# Altium PCB PCB_Max30100_2025-12-17.pcbdoc
Units mm, origin at the board's own origin, x right, y up, seen from the top; angles counter-clockwise.
Board outline 121.28 x 126.93 mm, 2 copper layers (Top Layer, Bottom Layer); 16 components, 15 nets, 78 pads, 0 vias.
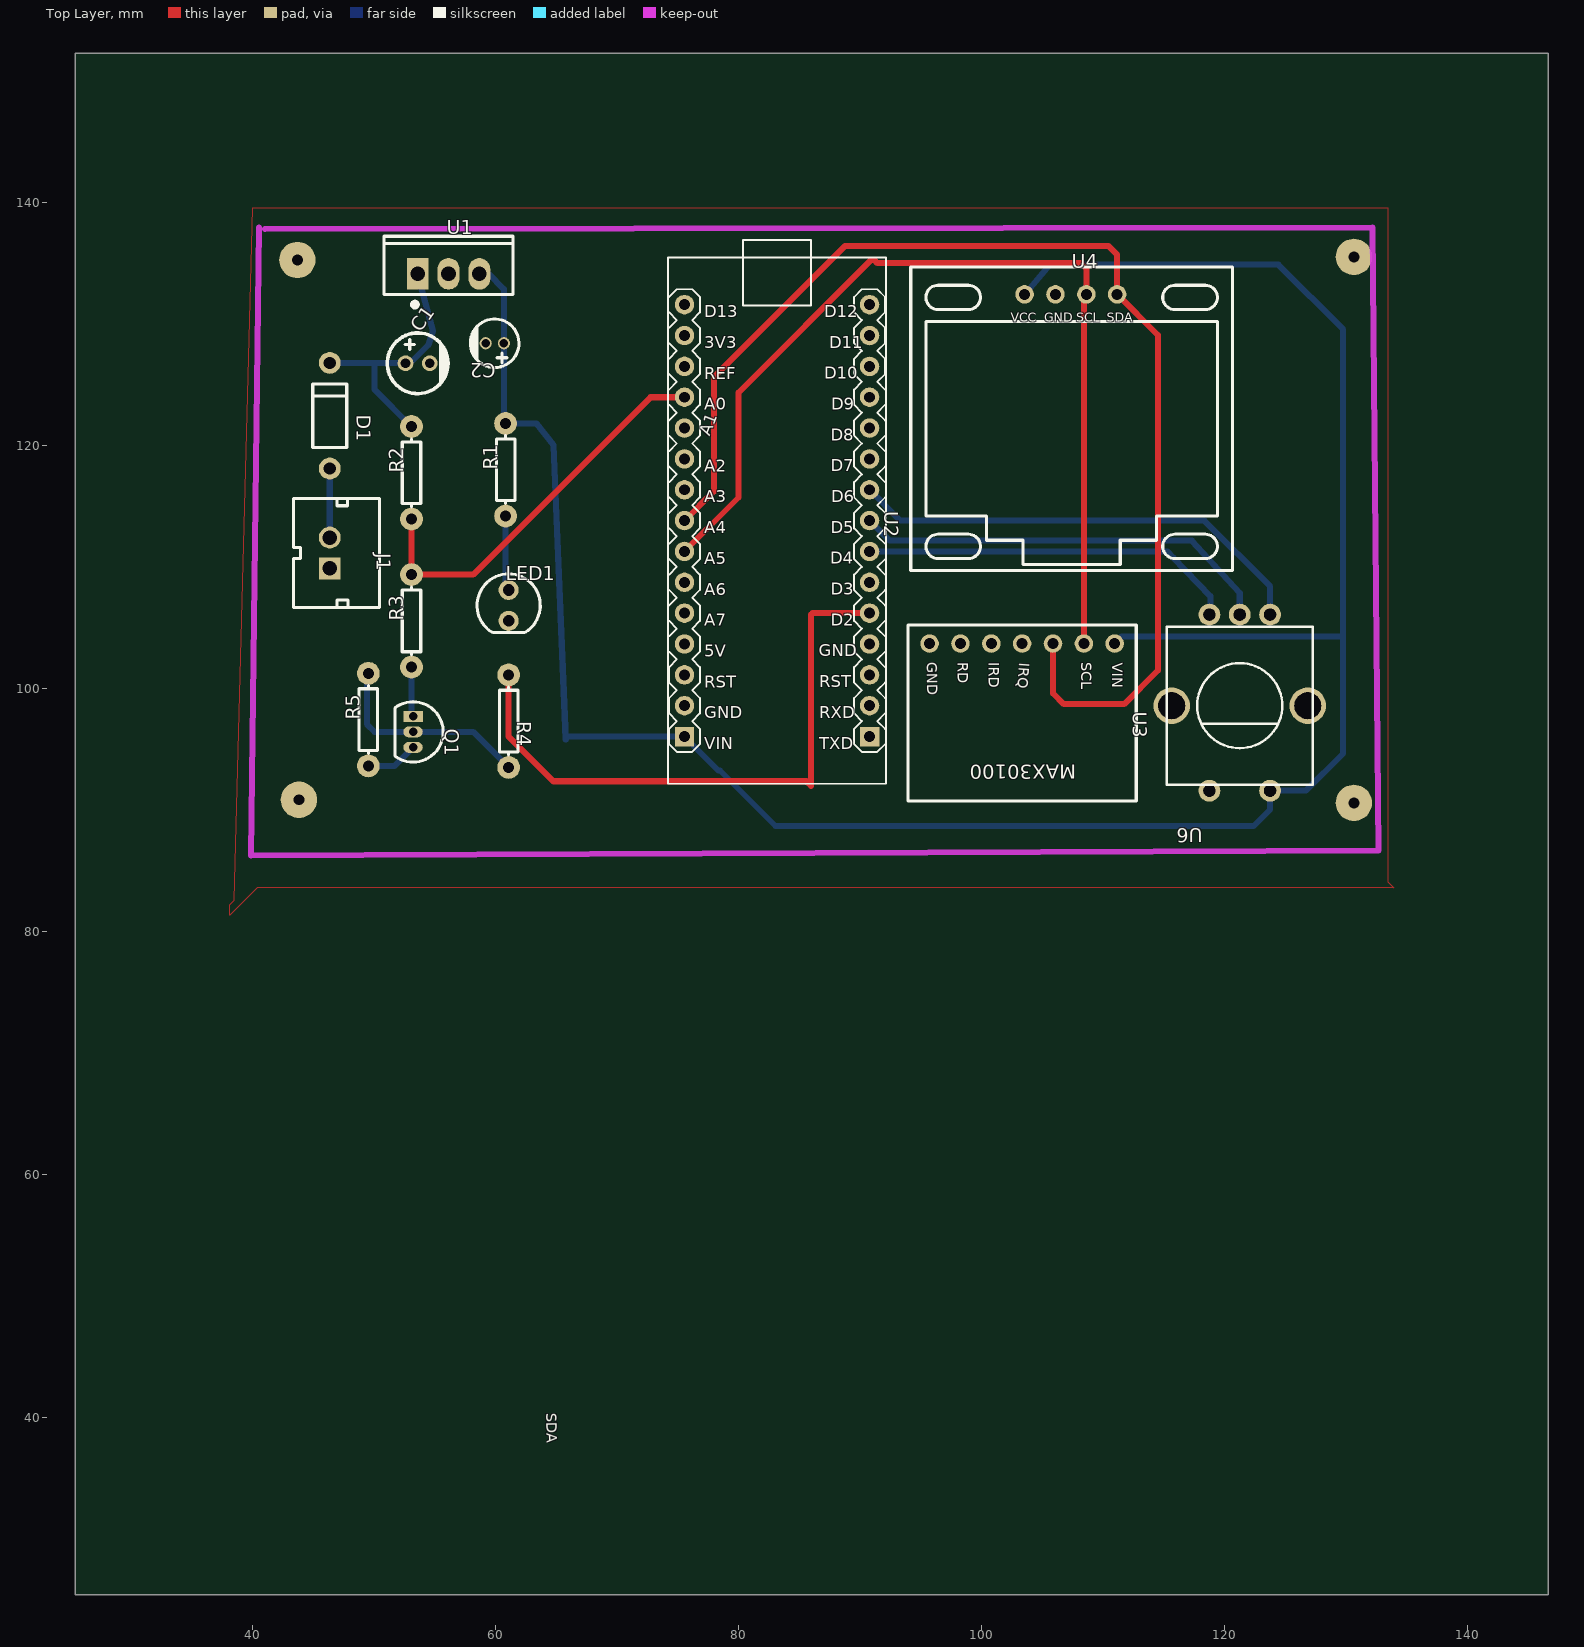
[diagram p0: Top Layer view]
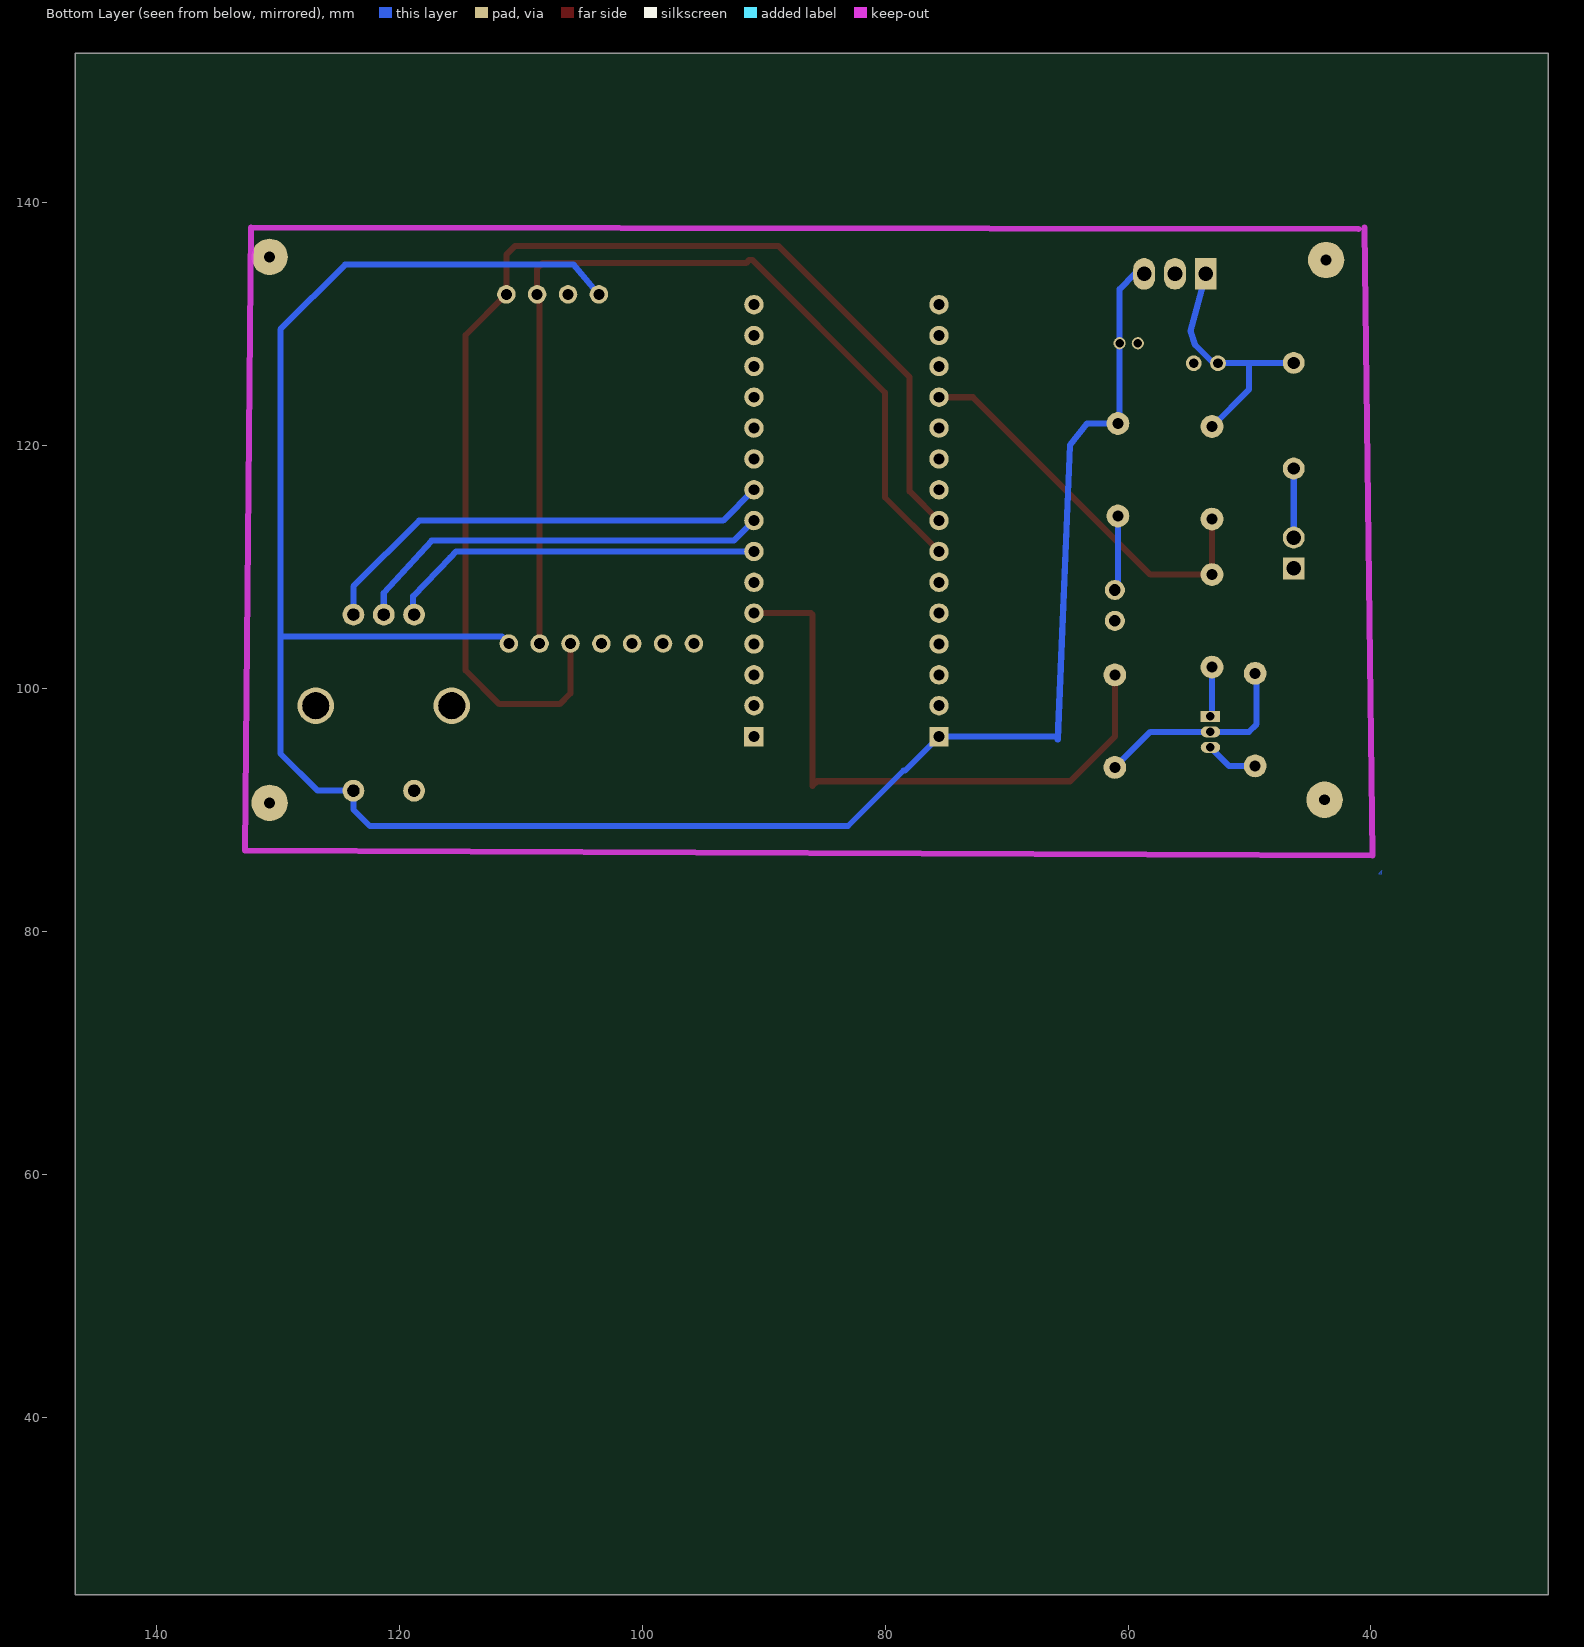
[diagram p1: Bottom Layer view, seen from below]

## Layer stack, top to bottom
Top Layer: signal copper (thickness not stored)
Dielectric: dielectric 0.32, FR-4, Dk 4.8
Bottom Layer: signal copper (thickness not stored)

## Board outline
146.685,25.4 25.4,25.4 25.4,152.326 146.685,152.326

## Components (designator, comment, footprint, x,y, rotation, side; value= is the part's Value field where it differs from the comment)
C1 "100uF/16V" CAP-D5.0×F2.0 53.594,126.799 r0 top
C2 "10uF" CAP-D4.0×F1.5 59.944,128.45 r180 top
D1 "1N4007" DO-41_BD2.4-L4.7-P8.70-D0.9-RD 46.355,122.481 r270 top
J1 "RMC 2.54_1x2" RMC_2P 46.355,111.178 r270 top
LED1 "0" LED-TH_BD5.0_RED 61.087,106.86 r0 top
Q1 "BC547C" TO-92-3_L4.9-W3.7-P1.27-L 53.213,96.446 r270 top
R1 "1k" R_AXIAL-0.3 60.833,118.036 r90 top
R2 "10K" R_AXIAL-0.3 53.086,117.782 r90 top
R3 "2K" R_AXIAL-0.3 53.086,105.59 r90 top
R4 "220R" R_AXIAL-0.3 61.087,97.335 r270 top
R5 "10K" R_AXIAL-0.3 49.53,97.462 r90 top
U1 "7805(TO-220)" TO-220-3_L10.0-W4.5-P2.54-L 56.134,134.165 r0 top
U2 "ARDUINO_NANO" COMM-TH_ARDUINO_NANO 83.185,113.845 r270 top
U3 "MAX30100 MODULE COPY" MAX30100_MODULE 111.252,104.193 r270 top
U4 "OLED-Module-096inch" OLED-MODULE-096INCH-FOOTPRINT 107.442,122.227 r0 top
U6 "Rotary Encoder" SF-ROTARY-ENCODER-SWITCH 121.285,98.605 r180 top

## Footprints (in the part's own frame and the unit in brackets; to place one, negate y for a bottom-side part, rotate by r counter-clockwise, add the part's x,y. Pads: shape width x height; smd on the part's side, far side on the other; paste and mask are expansions set on the pad)
CAP-D4.0×F1.5 [mm]
  round 1 hole 0.7 paste+0 mask+0.102: 1(-0.751,0) 2(0.751,0)
  silkscreen extent -1.98,-2 2.02,2
CAP-D5.0×F2.0 [mm]
  round 1.3 hole 0.8 paste+0 mask+0.102: 1(-1,0) 2(1,0)
  silkscreen extent -2.5,-2.5 2.5,2.5
COMM-TH_ARDUINO_NANO [mm]
  rect 1.6x1.6 hole 0.9 paste+0 mask+0.051: 1(17.78,7.62) 30(17.78,-7.62)
  round 1.6 hole 0.9 paste+0 mask+0.051: 2(15.24,7.62) 3(12.7,7.62) 4(10.16,7.62) 5(7.621,7.62) 6(5.08,7.62) 7(2.541,7.62) 8(0,7.62) 9(-2.539,7.62) 10(-5.08,7.62) 11(-7.619,7.62) 12(-10.16,7.62) 13(-12.699,7.62) 14(-15.24,7.62) 15(-17.78,7.62) 16(-17.78,-7.62) 17(-15.241,-7.62) 18(-12.7,-7.62) 19(-10.161,-7.62) 20(-7.62,-7.62) 21(-5.081,-7.62) 22(-2.54,-7.62) 23(-0.001,-7.62) 24(2.54,-7.62) 25(5.079,-7.62) 26(7.62,-7.62) 27(10.159,-7.62) 28(12.7,-7.62) 29(15.24,-7.62)
  silkscreen extent -23.11,-8.97 21.67,8.97
DO-41_BD2.4-L4.7-P8.70-D0.9-RD [mm]
  round 1.8 hole 1 paste+0 mask+0.051: 1(-4.35,0) 2(4.35,0)
  silkscreen extent -2.6,-1.4 2.6,1.4
LED-TH_BD5.0_RED [mil]
  round 65 hole 38 paste+0 mask+2: 1(0,50) 2(0,-50)
  silkscreen extent -102,-88 102,102
MAX30100_MODULE [mil]
  round 60 hole 36 paste+0 mask+4: 1(18.5,-10.4) 2(18.5,-110.4) 3(18.5,-210.4) 4(18.5,-310.4) 5(18.5,-410.4) 6(18.5,-510.4) 7(18.5,-610.4)
  silkscreen extent -42,-680 529,60
OLED-MODULE-096INCH-FOOTPRINT [mil]
  round 60 hole 36 paste+0 mask+10: 1(-152.36,403.54) 2(-52.36,403.54) 3(47.64,403.54) 4(147.64,403.54)
  silkscreen extent -522,-492 522,492
R_AXIAL-0.3 [mil]
  round 74 hole 35.4 paste+0 mask+2: 1(-150,0) 2(150,0)
  silkscreen extent -110,-30 110,30
RMC_2P [mm]
  rect 1.8x1.8 hole 1.2 paste+0 mask+0.102: 1(1.27,0)
  round 1.8 hole 1.2 paste+0 mask+0.102: 2(-1.27,0)
  silkscreen extent -4.5,-3 4.5,4.08
SF-ROTARY-ENCODER-SWITCH [mm]
  round 1.8 hole 1 paste+0 mask+0.051: 1(-2.5,-7.5) 2(0,-7.5) 3(2.5,-7.5) 4(-2.5,7) 5(2.5,7)
  round 3 hole 2.2 paste+0 mask+0.051: ""(-5.6,0) ""(5.6,0)
  silkscreen extent -6,-6.5 6,6.5
TO-92-3_L4.9-W3.7-P1.27-L [mm]
  rect 0.9x1.6 hole 0.7 paste+0 mask+0.051: 1(-1.27,0)
  oval 0.9x1.6 hole 0.7 paste+0 mask+0.051: 2(0,0) 3(1.27,0)
  silkscreen extent -2.48,-1.5 2.48,2.48
TO-220-3_L10.0-W4.5-P2.54-L [mm]
  rect 1.8x2.6 hole 1.2 paste+0 mask+0.051: 1(-2.54,0.005)
  oval 1.8x2.6 hole 1.2 paste+0 mask+0.051: 2(0,0.005) 3(2.54,-0.005)
  silkscreen extent -5.3,-2.73 5.3,3.09

## Free pads (board coordinates)
  round 3 hole 0.9 paste+0 mask+0.051: 13(130.683,135.561) 14(43.688,135.307) 15(43.815,90.857) 16(130.683,90.603)

## Nets (pads, with @x,y where several pads share a name; then routed paths per layer and width w, separated by ;. In a path a pad name is that pad's centre, name@x,y a point inside that pad or via, vN(x,y) a via of type N, cw(c..) or ccw(c..) an arc to the next point about the centre after c; other vN are vias at no path point)
+5V: C2.1 R1.2 U1.3 U2.30 U3.1 U4.1 U6.4 | length 196.9
  Bottom Layer w0.5: U1.3 59.429,134.16 60.695,132.895 C2.1 60.695,121.984 R1.2 63.373,121.846 64.77,120.068 65.786,95.811 65.913,96.064 U2.30 78.359,93.271 78.486,93.271 83.058,88.699 122.428,88.699 123.785,90.055 U6.4 126.731,91.605 129.794,94.668 129.794,129.593 124.46,134.927 105.664,134.927 U4.1 ; U3.1 111.569,104.304 129.794,104.304
CLOCK: U2.9 U6.1 | length 38.6
  Bottom Layer w0.5: U2.9@90.805,116.384 93.345,113.845 118.364,113.845 123.785,108.424 U6.1
DATA: U2.8 U6.2 | length 34.8
  Bottom Layer w0.5: U2.8 92.456,112.194 117.348,112.194 121.285,107.876 U6.2
GND: C1.2 C2.2 J1.1 LED1.2 pad.13 pad.14 pad.15 pad.16 Q1.3 R5.1 U1.2 U2.4 U2.29 U3.7 U4.2 U6.5 | length 4.3
  Bottom Layer w0.5: R5.1 51.689,93.652 Q1.3
INT: U2.6 U3.4
J1_2: D1.2 J1.2 | length 5.7
  Bottom Layer w0.5: J1.2 D1.2
Q1_2: Q1.2 R4.2 R5.2 | length 17.4
  Bottom Layer w0.5: R5.2 49.403,101.145 49.403,97.081 50.038,96.446 Q1.2 58.166,96.446 R4.2
R1_1: LED1.1 R1.1 | length 6.2
  Bottom Layer w0.5: R1.1 60.833,108.384 LED1.1
R3_1: Q1.1 R3.1 | length 4.1
  Bottom Layer w0.5: R3.1 53.086,97.843 Q1.1
SCL: U2.24 U3.2 U4.3 | length 79.3
  Top Layer w0.5: U2.24 80.01,115.749 80.01,124.386 90.932,135.308 91.186,135.308 91.44,135.054 108.204,135.054 108.652,134.605 U4.3 108.448,132.272 U3.2
SDA: U2.23 U3.3 U4.4 | length 100.7
  Top Layer w0.5: U2.23 77.978,116.258 77.978,125.656 88.773,136.451 110.49,136.451 111.191,135.75 U4.4 ; U3.3 105.908,99.631 106.807,98.732 111.76,98.732 114.554,101.526 114.554,129.115 U4.4
SW: U2.7 U6.3 | length 31.2
  Bottom Layer w0.5: U2.7@90.805,111.304 115.316,111.304 115.824,110.797 118.872,107.622 118.872,106.191 U6.3
VBAT: C1.1 D1.1 R2.2 U1.1 | length 21.4
  Bottom Layer w0.5: D1.1 52.562,126.831 C1.1 52.959,126.799 54.483,128.323 54.864,129.466 U1.1 ; 50.026,126.831 50.026,124.652 R2.2
VCTRL: R4.1 U2.5 | length 50.6
  Top Layer w0.5: R4.1 61.087,96.065 64.77,92.382 85.598,92.382 85.979,92.001 85.979,106.098 86.106,106.225 U2.5@90.805,106.224
VSENS: R2.1 R3.2 U2.19 | length 33.1
  Top Layer w0.5: R2.1 R3.2 58.166,109.4 72.771,124.005 U2.19
pads on no net: U2.1 U2.2 U2.3 U2.10 U2.11 U2.12 U2.13 U2.14 U2.15 U2.16 U2.17 U2.18 U2.20 U2.21 U2.22 U2.25 U2.26 U2.27 U2.28 U3.5 U3.6 U6.

## Polygon pours and split planes (outlines as drawn)
GND on Top Layer (solid): 40.005,139.626 133.477,139.626 133.477,84.127 133.985,83.619 40.386,83.619 38.1,81.333 38.1,82.222 38.481,82.603
GND on Bottom Layer (solid): 39.116,85.016 39.37,84.762 39.116,84.762 39.116,85.016

## Text inside footprints (layer, text, board x,y; h text height)
U2: Top Overlay "D13" at 77.195,130.576 h1; Top Overlay "3V3" at 77.195,128.036 h1; Top Overlay "REF" at 77.195,125.496 h1; Top Overlay "A0" at 77.195,122.956 h1; Top Overlay "A1" at 77.662,120.737 h1 r69; Top Overlay "A2" at 77.195,117.876 h1; Top Overlay "A3" at 77.195,115.336 h1; Top Overlay "A4" at 77.195,112.796 h1; Top Overlay "A5" at 77.195,110.256 h1; Top Overlay "A6" at 77.195,107.716 h1; Top Overlay "A7" at 77.195,105.176 h1; Top Overlay "5V" at 77.195,102.636 h1; Top Overlay "RST" at 77.195,100.096 h1; Top Overlay "GND" at 77.195,97.556 h1; Top Overlay "VIN" at 77.195,95.016 h1; Top Overlay "D12" at 87.084,130.596 h1; Top Overlay "D11" at 87.493,128.056 h1; Top Overlay "D10" at 87.084,125.516 h1; Top Overlay "D9" at 87.658,122.976 h1; Top Overlay "D8" at 87.612,120.436 h1; Top Overlay "D7" at 87.612,117.896 h1; Top Overlay "D6" at 87.658,115.356 h1; Top Overlay "D5" at 87.612,112.816 h1; Top Overlay "D4" at 87.566,110.276 h1; Top Overlay "D3" at 87.612,107.736 h1; Top Overlay "D2" at 87.612,105.196 h1; Top Overlay "GND" at 86.629,102.656 h1; Top Overlay "RST" at 86.675,100.116 h1; Top Overlay "RXD" at 86.675,97.576 h1; Top Overlay "TXD" at 86.675,95.036 h1
U3: Top Overlay "VIN" at 110.49,102.161 h1.5 r270; Top Overlay "SCL" at 107.94,102.199 h1.5 r270; Top Overlay "SDA" at 63.881,40.35 h1.5 r271; Top Overlay "IRQ" at 102.86,102.199 h1.5 r266; Top Overlay "IRD" at 100.32,102.199 h1.5 r270; Top Overlay "RD" at 97.78,102.199 h1.5 r270; Top Overlay "GND" at 95.24,102.199 h1.5 r271; Top Overlay "MAX30100" at 107.823,94.16 h2.03 r180
U4: Top Overlay "VCC" at 102.442,130.202 h0.75; Top Overlay "GND" at 105.192,130.202 h0.75; Top Overlay "SCL" at 107.842,130.202 h0.75; Top Overlay "SDA" at 110.342,130.202 h0.75